# Altium PCB PCB2.PcbDoc (part 2 of 2)
Units mm, origin at the board's own origin, x right, y up, seen from the top; angles counter-clockwise.
Board outline 126 x 36 mm, 2 copper layers (Top Layer, Bottom Layer); 351 components, 48 nets, 702 pads, 346 vias.
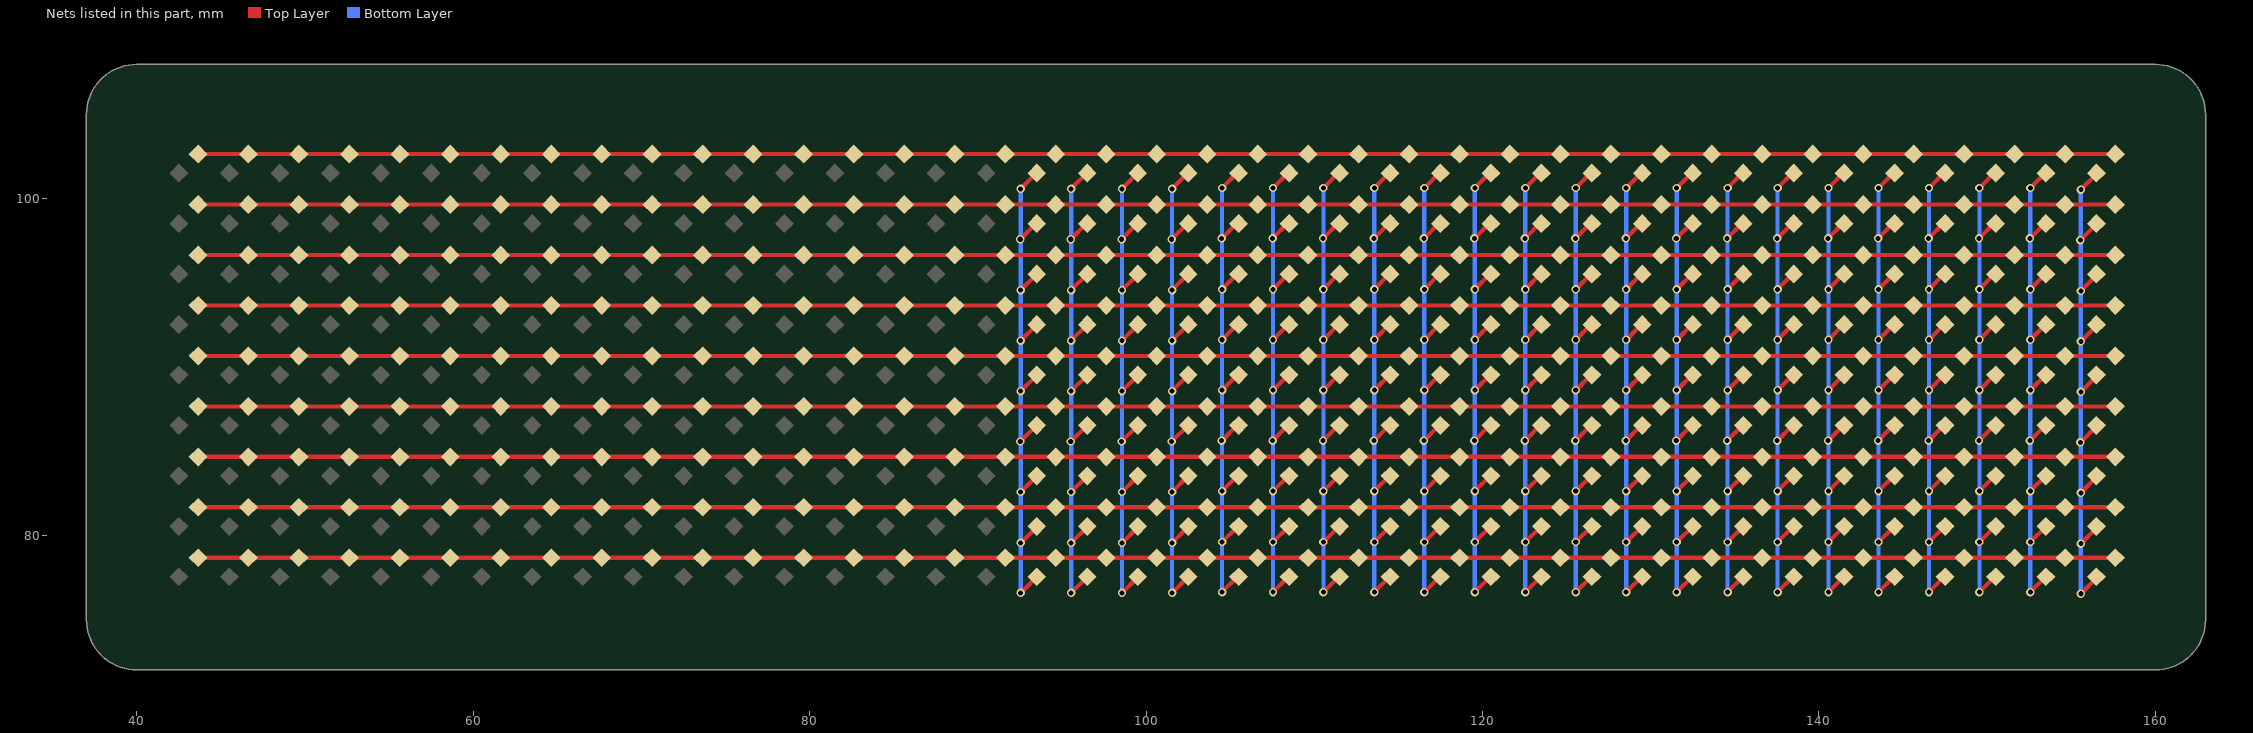
[diagram p2: the nets of this part, all layers, seen from the top]

## Via types
v1: diameter 0.5, hole 0.3, Top Layer to Bottom Layer, 342 vias
v2: diameter 3, hole 3, Top Layer to Bottom Layer, 4 vias

## Nets (pads, with @x,y where several pads share a name; then routed paths per layer and width w, separated by ;. In a path a pad name is that pad's centre, name@x,y a point inside that pad or via, vN(x,y) a via of type N, cw(c..) or ccw(c..) an arc to the next point about the centre after c; other vN are vias at no path point) (continued)
CS18: C1-18.2 C1-57.2 C1-96.2 C1-135.2 C1-174.2 C1-213.2 C1-252.2 C1-291.2 C1-330.2 | length 35.8
  Top Layer w0.254: v1(92.525,85.575) C1-213.2@93.457,86.507 ; v1(92.525,97.6) C1-57.2@93.457,98.532 ; v1(92.55,76.575) C1-330.2@93.482,77.507 ; v1(92.55,79.55) C1-291.2@93.482,80.482 ; v1(92.55,82.575) C1-252.2@93.482,83.507 ; v1(92.55,88.575) C1-174.2@93.482,89.507 ; v1(92.55,91.575) C1-135.2@93.482,92.507 ; v1(92.55,94.575) C1-96.2@93.482,95.507 ; v1(92.55,100.6) C1-18.2@93.482,101.532
  Bottom Layer w0.254: v1(92.55,76.575) v1(92.55,79.55) v1(92.55,82.575) v1(92.55,88.575) v1(92.55,91.575) v1(92.55,94.575) v1@92.55,100.55
CS19: C1-19.2 C1-58.2 C1-97.2 C1-136.2 C1-175.2 C1-214.2 C1-253.2 C1-292.2 C1-331.2 | length 35.8
  Top Layer w0.254: v1(95.525,85.575) C1-214.2@96.457,86.507 ; v1(95.525,97.6) C1-58.2@96.457,98.532 ; v1(95.55,76.575) C1-331.2@96.482,77.507 ; v1(95.55,79.55) C1-292.2@96.482,80.482 ; v1(95.55,82.575) C1-253.2@96.482,83.507 ; v1(95.55,88.575) C1-175.2@96.482,89.507 ; v1(95.55,91.575) C1-136.2@96.482,92.507 ; v1(95.55,94.575) C1-97.2@96.482,95.507 ; v1(95.55,100.6) C1-19.2@96.482,101.532
  Bottom Layer w0.254: v1(95.55,76.575) v1(95.55,79.55) v1(95.55,82.575) v1(95.55,88.575) v1(95.55,91.575) v1(95.55,94.575) v1@95.55,100.55
CS20: C1-20.2 C1-59.2 C1-98.2 C1-137.2 C1-176.2 C1-215.2 C1-254.2 C1-293.2 C1-332.2 | length 35.8
  Top Layer w0.254: v1(98.55,85.575) C1-215.2@99.482,86.507 ; v1(98.55,97.6) C1-59.2@99.482,98.532 ; v1(98.575,76.575) C1-332.2@99.507,77.507 ; v1(98.575,79.55) C1-293.2@99.507,80.482 ; v1(98.575,82.575) C1-254.2@99.507,83.507 ; v1(98.575,88.575) C1-176.2@99.507,89.507 ; v1(98.575,91.575) C1-137.2@99.507,92.507 ; v1(98.575,94.575) C1-98.2@99.507,95.507 ; v1(98.575,100.6) C1-20.2@99.507,101.532
  Bottom Layer w0.254: v1(98.575,76.575) v1(98.575,79.55) v1(98.575,82.575) v1(98.575,88.575) v1(98.575,91.575) v1(98.575,94.575) v1@98.575,100.55
CS21: C1-21.2 C1-60.2 C1-99.2 C1-138.2 C1-177.2 C1-216.2 C1-255.2 C1-294.2 C1-333.2 | length 35.8
  Top Layer w0.254: v1(101.525,85.575) C1-216.2@102.457,86.507 ; v1(101.525,97.6) C1-60.2@102.457,98.532 ; v1(101.55,76.575) C1-333.2@102.482,77.507 ; v1(101.55,79.55) C1-294.2@102.482,80.482 ; v1(101.55,82.575) C1-255.2@102.482,83.507 ; v1(101.55,88.575) C1-177.2@102.482,89.507 ; v1(101.55,91.575) C1-138.2@102.482,92.507 ; v1(101.55,94.575) C1-99.2@102.482,95.507 ; v1(101.55,100.6) C1-21.2@102.482,101.532
  Bottom Layer w0.254: v1(101.55,76.575) v1(101.55,79.55) v1(101.55,82.575) v1(101.55,88.575) v1(101.55,91.575) v1(101.55,94.575) v1@101.55,100.55
CS22: C1-22.2 C1-61.2 C1-100.2 C1-139.2 C1-178.2 C1-217.2 C1-256.2 C1-295.2 C1-334.2 | length 35.8
  Top Layer w0.254: v1(104.5,85.625) C1-217.2@105.432,86.557 ; v1(104.5,97.65) C1-61.2@105.432,98.582 ; v1(104.525,76.625) C1-334.2@105.457,77.557 ; v1(104.525,79.6) C1-295.2@105.457,80.532 ; v1(104.525,82.625) C1-256.2@105.457,83.557 ; v1(104.525,88.625) C1-178.2@105.457,89.557 ; v1(104.525,91.625) C1-139.2@105.457,92.557 ; v1(104.525,94.625) C1-100.2@105.457,95.557 ; v1(104.525,100.65) C1-22.2@105.457,101.582
  Bottom Layer w0.254: v1(104.525,76.625) v1(104.525,79.6) v1(104.525,82.625) v1(104.525,88.625) v1(104.525,91.625) v1(104.525,94.625) v1@104.525,100.6
CS23: C1-23.2 C1-62.2 C1-101.2 C1-140.2 C1-179.2 C1-218.2 C1-257.2 C1-296.2 C1-335.2 | length 35.8
  Top Layer w0.254: v1(107.525,85.625) C1-218.2@108.457,86.557 ; v1(107.525,97.65) C1-62.2@108.457,98.582 ; v1(107.55,76.625) C1-335.2@108.482,77.557 ; v1(107.55,79.6) C1-296.2@108.482,80.532 ; v1(107.55,82.625) C1-257.2@108.482,83.557 ; v1(107.55,88.625) C1-179.2@108.482,89.557 ; v1(107.55,91.625) C1-140.2@108.482,92.557 ; v1(107.55,94.625) C1-101.2@108.482,95.557 ; v1(107.55,100.65) C1-23.2@108.482,101.582
  Bottom Layer w0.254: v1(107.55,76.625) v1(107.55,79.6) v1(107.55,82.625) v1(107.55,88.625) v1(107.55,91.625) v1(107.55,94.625) v1@107.55,100.6
CS24: C1-24.2 C1-63.2 C1-102.2 C1-141.2 C1-180.2 C1-219.2 C1-258.2 C1-297.2 C1-336.2 | length 35.8
  Top Layer w0.254: v1(110.525,85.625) C1-219.2@111.457,86.557 ; v1(110.525,97.65) C1-63.2@111.457,98.582 ; v1(110.55,76.625) C1-336.2@111.482,77.557 ; v1(110.55,79.6) C1-297.2@111.482,80.532 ; v1(110.55,82.625) C1-258.2@111.482,83.557 ; v1(110.55,88.625) C1-180.2@111.482,89.557 ; v1(110.55,91.625) C1-141.2@111.482,92.557 ; v1(110.55,94.625) C1-102.2@111.482,95.557 ; v1(110.55,100.65) C1-24.2@111.482,101.582
  Bottom Layer w0.254: v1(110.55,76.625) v1(110.55,79.6) v1(110.55,82.625) v1(110.55,88.625) v1(110.55,91.625) v1(110.55,94.625) v1@110.55,100.6
CS25: C1-25.2 C1-64.2 C1-103.2 C1-142.2 C1-181.2 C1-220.2 C1-259.2 C1-298.2 C1-337.2 | length 35.8
  Top Layer w0.254: v1(113.55,85.625) C1-220.2@114.482,86.557 ; v1(113.55,97.65) C1-64.2@114.482,98.582 ; v1(113.575,76.625) C1-337.2@114.507,77.557 ; v1(113.575,79.6) C1-298.2@114.507,80.532 ; v1(113.575,82.625) C1-259.2@114.507,83.557 ; v1(113.575,88.625) C1-181.2@114.507,89.557 ; v1(113.575,91.625) C1-142.2@114.507,92.557 ; v1(113.575,94.625) C1-103.2@114.507,95.557 ; v1(113.575,100.65) C1-25.2@114.507,101.582
  Bottom Layer w0.254: v1(113.575,76.625) v1(113.575,79.6) v1(113.575,82.625) v1(113.575,88.625) v1(113.575,91.625) v1(113.575,94.625) v1@113.575,100.6
CS26: C1-26.2 C1-65.2 C1-104.2 C1-143.2 C1-182.2 C1-221.2 C1-260.2 C1-299.2 C1-338.2 | length 35.8
  Top Layer w0.254: v1(116.525,85.625) C1-221.2@117.457,86.557 ; v1(116.525,97.65) C1-65.2@117.457,98.582 ; v1(116.55,76.625) C1-338.2@117.482,77.557 ; v1(116.55,79.6) C1-299.2@117.482,80.532 ; v1(116.55,82.625) C1-260.2@117.482,83.557 ; v1(116.55,88.625) C1-182.2@117.482,89.557 ; v1(116.55,91.625) C1-143.2@117.482,92.557 ; v1(116.55,94.625) C1-104.2@117.482,95.557 ; v1(116.55,100.65) C1-26.2@117.482,101.582
  Bottom Layer w0.254: v1(116.55,76.625) v1(116.55,79.6) v1(116.55,82.625) v1(116.55,88.625) v1(116.55,91.625) v1(116.55,94.625) v1@116.55,100.6
CS27: C1-27.2 C1-66.2 C1-105.2 C1-144.2 C1-183.2 C1-222.2 C1-261.2 C1-300.2 C1-339.2 | length 35.8
  Top Layer w0.254: v1(119.525,85.625) C1-222.2@120.457,86.557 ; v1(119.525,97.65) C1-66.2@120.457,98.582 ; v1(119.55,76.625) C1-339.2@120.482,77.557 ; v1(119.55,79.6) C1-300.2@120.482,80.532 ; v1(119.55,82.625) C1-261.2@120.482,83.557 ; v1(119.55,88.625) C1-183.2@120.482,89.557 ; v1(119.55,91.625) C1-144.2@120.482,92.557 ; v1(119.55,94.625) C1-105.2@120.482,95.557 ; v1(119.55,100.65) C1-27.2@120.482,101.582
  Bottom Layer w0.254: v1(119.55,76.625) v1(119.55,79.6) v1(119.55,82.625) v1(119.55,88.625) v1(119.55,91.625) v1(119.55,94.625) v1@119.55,100.6
CS28: C1-28.2 C1-67.2 C1-106.2 C1-145.2 C1-184.2 C1-223.2 C1-262.2 C1-301.2 C1-340.2 | length 35.8
  Top Layer w0.254: v1(122.525,85.625) C1-223.2@123.457,86.557 ; v1(122.525,97.65) C1-67.2@123.457,98.582 ; v1(122.55,76.625) C1-340.2@123.482,77.557 ; v1(122.55,79.6) C1-301.2@123.482,80.532 ; v1(122.55,82.625) C1-262.2@123.482,83.557 ; v1(122.55,88.625) C1-184.2@123.482,89.557 ; v1(122.55,91.625) C1-145.2@123.482,92.557 ; v1(122.55,94.625) C1-106.2@123.482,95.557 ; v1(122.55,100.65) C1-28.2@123.482,101.582
  Bottom Layer w0.254: v1(122.55,76.625) v1(122.55,79.6) v1(122.55,82.625) v1(122.55,88.625) v1(122.55,91.625) v1(122.55,94.625) v1@122.55,100.6
CS29: C1-29.2 C1-68.2 C1-107.2 C1-146.2 C1-185.2 C1-224.2 C1-263.2 C1-302.2 C1-341.2 | length 35.8
  Top Layer w0.254: v1(125.525,85.625) C1-224.2@126.457,86.557 ; v1(125.525,97.65) C1-68.2@126.457,98.582 ; v1(125.55,76.625) C1-341.2@126.482,77.557 ; v1(125.55,79.6) C1-302.2@126.482,80.532 ; v1(125.55,82.625) C1-263.2@126.482,83.557 ; v1(125.55,88.625) C1-185.2@126.482,89.557 ; v1(125.55,91.625) C1-146.2@126.482,92.557 ; v1(125.55,94.625) C1-107.2@126.482,95.557 ; v1(125.55,100.65) C1-29.2@126.482,101.582
  Bottom Layer w0.254: v1(125.55,76.625) v1(125.55,79.6) v1(125.55,82.625) v1(125.55,88.625) v1(125.55,91.625) v1(125.55,94.625) v1@125.55,100.6
CS30: C1-30.2 C1-69.2 C1-108.2 C1-147.2 C1-186.2 C1-225.2 C1-264.2 C1-303.2 C1-342.2 | length 35.8
  Top Layer w0.254: v1(128.525,85.625) C1-225.2@129.457,86.557 ; v1(128.525,97.65) C1-69.2@129.457,98.582 ; v1(128.55,76.625) C1-342.2@129.482,77.557 ; v1(128.55,79.6) C1-303.2@129.482,80.532 ; v1(128.55,82.625) C1-264.2@129.482,83.557 ; v1(128.55,88.625) C1-186.2@129.482,89.557 ; v1(128.55,91.625) C1-147.2@129.482,92.557 ; v1(128.55,94.625) C1-108.2@129.482,95.557 ; v1(128.55,100.65) C1-30.2@129.482,101.582
  Bottom Layer w0.254: v1(128.55,76.625) v1(128.55,79.6) v1(128.55,82.625) v1(128.55,88.625) v1(128.55,91.625) v1(128.55,94.625) v1@128.55,100.6
CS31: C1-31.2 C1-70.2 C1-109.2 C1-148.2 C1-187.2 C1-226.2 C1-265.2 C1-304.2 C1-343.2 | length 35.8
  Top Layer w0.254: v1(131.525,85.625) C1-226.2@132.457,86.557 ; v1(131.525,97.65) C1-70.2@132.457,98.582 ; v1(131.55,76.625) C1-343.2@132.482,77.557 ; v1(131.55,79.6) C1-304.2@132.482,80.532 ; v1(131.55,82.625) C1-265.2@132.482,83.557 ; v1(131.55,88.625) C1-187.2@132.482,89.557 ; v1(131.55,91.625) C1-148.2@132.482,92.557 ; v1(131.55,94.625) C1-109.2@132.482,95.557 ; v1(131.55,100.65) C1-31.2@132.482,101.582
  Bottom Layer w0.254: v1(131.55,76.625) v1(131.55,79.6) v1(131.55,82.625) v1(131.55,88.625) v1(131.55,91.625) v1(131.55,94.625) v1@131.55,100.6
CS32: C1-32.2 C1-71.2 C1-110.2 C1-149.2 C1-188.2 C1-227.2 C1-266.2 C1-305.2 C1-344.2 | length 35.8
  Top Layer w0.254: v1(134.55,85.625) C1-227.2@135.482,86.557 ; v1(134.55,97.65) C1-71.2@135.482,98.582 ; v1(134.575,76.625) C1-344.2@135.507,77.557 ; v1(134.575,79.6) C1-305.2@135.507,80.532 ; v1(134.575,82.625) C1-266.2@135.507,83.557 ; v1(134.575,88.625) C1-188.2@135.507,89.557 ; v1(134.575,91.625) C1-149.2@135.507,92.557 ; v1(134.575,94.625) C1-110.2@135.507,95.557 ; v1(134.575,100.65) C1-32.2@135.507,101.582
  Bottom Layer w0.254: v1(134.575,76.625) v1(134.575,79.6) v1(134.575,82.625) v1(134.575,88.625) v1(134.575,91.625) v1(134.575,94.625) v1@134.575,100.6
CS33: C1-33.2 C1-72.2 C1-111.2 C1-150.2 C1-189.2 C1-228.2 C1-267.2 C1-306.2 C1-345.2 | length 35.8
  Top Layer w0.254: v1(137.525,85.625) C1-228.2@138.457,86.557 ; v1(137.525,97.65) C1-72.2@138.457,98.582 ; v1(137.55,76.625) C1-345.2@138.482,77.557 ; v1(137.55,79.6) C1-306.2@138.482,80.532 ; v1(137.55,82.625) C1-267.2@138.482,83.557 ; v1(137.55,88.625) C1-189.2@138.482,89.557 ; v1(137.55,91.625) C1-150.2@138.482,92.557 ; v1(137.55,94.625) C1-111.2@138.482,95.557 ; v1(137.55,100.65) C1-33.2@138.482,101.582
  Bottom Layer w0.254: v1(137.55,76.625) v1(137.55,79.6) v1(137.55,82.625) v1(137.55,88.625) v1(137.55,91.625) v1(137.55,94.625) v1@137.55,100.6
CS34: C1-34.2 C1-73.2 C1-112.2 C1-151.2 C1-190.2 C1-229.2 C1-268.2 C1-307.2 C1-346.2 | length 35.8
  Top Layer w0.254: v1(140.55,85.625) C1-229.2@141.482,86.557 ; v1(140.55,97.65) C1-73.2@141.482,98.582 ; v1(140.575,76.625) C1-346.2@141.507,77.557 ; v1(140.575,79.6) C1-307.2@141.507,80.532 ; v1(140.575,82.625) C1-268.2@141.507,83.557 ; v1(140.575,88.625) C1-190.2@141.507,89.557 ; v1(140.575,91.625) C1-151.2@141.507,92.557 ; v1(140.575,94.625) C1-112.2@141.507,95.557 ; v1(140.575,100.65) C1-34.2@141.507,101.582
  Bottom Layer w0.254: v1(140.575,76.625) v1(140.575,79.6) v1(140.575,82.625) v1(140.575,88.625) v1(140.575,91.625) v1(140.575,94.625) v1@140.575,100.6
CS35: C1-35.2 C1-74.2 C1-113.2 C1-152.2 C1-191.2 C1-230.2 C1-269.2 C1-308.2 C1-347.2 | length 35.8
  Top Layer w0.254: v1(143.525,85.625) C1-230.2@144.457,86.557 ; v1(143.525,97.65) C1-74.2@144.457,98.582 ; v1(143.55,76.625) C1-347.2@144.482,77.557 ; v1(143.55,79.6) C1-308.2@144.482,80.532 ; v1(143.55,82.625) C1-269.2@144.482,83.557 ; v1(143.55,88.625) C1-191.2@144.482,89.557 ; v1(143.55,91.625) C1-152.2@144.482,92.557 ; v1(143.55,94.625) C1-113.2@144.482,95.557 ; v1(143.55,100.65) C1-35.2@144.482,101.582
  Bottom Layer w0.254: v1(143.55,76.625) v1(143.55,79.6) v1(143.55,82.625) v1(143.55,88.625) v1(143.55,91.625) v1(143.55,94.625) v1@143.55,100.6
CS36: C1-36.2 C1-75.2 C1-114.2 C1-153.2 C1-192.2 C1-231.2 C1-270.2 C1-309.2 C1-348.2 | length 35.8
  Top Layer w0.254: v1(146.525,85.625) C1-231.2@147.457,86.557 ; v1(146.525,97.65) C1-75.2@147.457,98.582 ; v1(146.55,76.625) C1-348.2@147.482,77.557 ; v1(146.55,79.6) C1-309.2@147.482,80.532 ; v1(146.55,82.625) C1-270.2@147.482,83.557 ; v1(146.55,88.625) C1-192.2@147.482,89.557 ; v1(146.55,91.625) C1-153.2@147.482,92.557 ; v1(146.55,94.625) C1-114.2@147.482,95.557 ; v1(146.55,100.65) C1-36.2@147.482,101.582
  Bottom Layer w0.254: v1(146.55,76.625) v1(146.55,79.6) v1(146.55,82.625) v1(146.55,88.625) v1(146.55,91.625) v1(146.55,94.625) v1@146.55,100.6
CS37: C1-37.2 C1-76.2 C1-115.2 C1-154.2 C1-193.2 C1-232.2 C1-271.2 C1-310.2 C1-349.2 | length 35.8
  Top Layer w0.254: v1(149.525,85.625) C1-232.2@150.457,86.557 ; v1(149.525,97.65) C1-76.2@150.457,98.582 ; v1(149.55,76.625) C1-349.2@150.482,77.557 ; v1(149.55,79.6) C1-310.2@150.482,80.532 ; v1(149.55,82.625) C1-271.2@150.482,83.557 ; v1(149.55,88.625) C1-193.2@150.482,89.557 ; v1(149.55,91.625) C1-154.2@150.482,92.557 ; v1(149.55,94.625) C1-115.2@150.482,95.557 ; v1(149.55,100.65) C1-37.2@150.482,101.582
  Bottom Layer w0.254: v1(149.55,76.625) v1(149.55,79.6) v1(149.55,82.625) v1(149.55,88.625) v1(149.55,91.625) v1(149.55,94.625) v1@149.55,100.6
CS38: C1-38.2 C1-77.2 C1-116.2 C1-155.2 C1-194.2 C1-233.2 C1-272.2 C1-311.2 C1-350.2 | length 35.8
  Top Layer w0.254: v1(152.55,85.625) C1-233.2@153.482,86.557 ; v1(152.55,97.65) C1-77.2@153.482,98.582 ; v1(152.575,76.625) C1-350.2@153.507,77.557 ; v1(152.575,79.6) C1-311.2@153.507,80.532 ; v1(152.575,82.625) C1-272.2@153.507,83.557 ; v1(152.575,88.625) C1-194.2@153.507,89.557 ; v1(152.575,91.625) C1-155.2@153.507,92.557 ; v1(152.575,94.625) C1-116.2@153.507,95.557 ; v1(152.575,100.65) C1-38.2@153.507,101.582
  Bottom Layer w0.254: v1(152.575,76.625) v1(152.575,79.6) v1(152.575,82.625) v1(152.575,88.625) v1(152.575,91.625) v1(152.575,94.625) v1@152.575,100.6
CS39: C1-39.2 C1-78.2 C1-117.2 C1-156.2 C1-195.2 C1-234.2 C1-273.2 C1-312.2 C1-351.2 | length 35.8
  Top Layer w0.254: v1(155.55,85.525) C1-234.2@156.482,86.457 ; v1(155.55,97.55) C1-78.2@156.482,98.482 ; v1(155.575,76.525) C1-351.2@156.507,77.457 ; v1(155.575,79.5) C1-312.2@156.507,80.432 ; v1(155.575,82.525) C1-273.2@156.507,83.457 ; v1(155.575,88.525) C1-195.2@156.507,89.457 ; v1(155.575,91.525) C1-156.2@156.507,92.457 ; v1(155.575,94.525) C1-117.2@156.507,95.457 ; v1(155.575,100.55) C1-39.2@156.507,101.482
  Bottom Layer w0.254: v1(155.575,76.525) v1(155.575,79.5) v1(155.575,82.525) v1(155.575,88.525) v1(155.575,91.525) v1(155.575,94.525) v1@155.575,100.5
SW1: C1-1.1 C1-2.1 C1-3.1 C1-4.1 C1-5.1 C1-6.1 C1-7.1 C1-8.1 C1-9.1 C1-10.1 C1-11.1 C1-12.1 C1-13.1 C1-14.1 C1-15.1 C1-16.1 C1-17.1 C1-18.1 C1-19.1 C1-20.1 C1-21.1 C1-22.1 C1-23.1 C1-24.1 C1-25.1 C1-26.1 C1-27.1 C1-28.1 C1-29.1 C1-30.1 C1-31.1 C1-32.1 C1-33.1 C1-34.1 C1-35.1 C1-36.1 C1-37.1 C1-38.1 C1-39.1 | length 114
  Top Layer w0.254: C1-1.1@43.639,102.664 C1-2.1@46.639,102.664 C1-3.1@49.639,102.664 C1-4.1@52.639,102.664 C1-5.1@55.639,102.664 C1-6.1@58.639,102.664 C1-7.1@61.639,102.664 C1-8.1@64.639,102.664 C1-9.1@67.639,102.664 C1-10.1@70.639,102.664 C1-11.1@73.639,102.664 C1-12.1@76.639,102.664 C1-13.1@79.639,102.664 C1-14.1@82.639,102.664 C1-15.1@85.639,102.664 C1-16.1@88.639,102.664 C1-17.1@91.639,102.664 C1-18.1@94.639,102.664 C1-19.1@97.639,102.664 C1-20.1@100.639,102.664 C1-21.1@103.639,102.664 C1-22.1@106.639,102.664 C1-23.1@109.639,102.664 C1-24.1@112.639,102.664 C1-25.1@115.639,102.664 C1-26.1@118.639,102.664 C1-27.1@121.639,102.664 C1-28.1@124.639,102.664 C1-29.1@127.639,102.664 C1-30.1@130.639,102.664 C1-31.1@133.639,102.664 C1-32.1@136.639,102.664 C1-33.1@139.639,102.664 C1-34.1@142.639,102.664 C1-35.1@145.639,102.664 C1-36.1@148.639,102.664 C1-37.1@151.639,102.664 C1-38.1@154.639,102.664 C1-39.1@157.639,102.664
SW2: C1-40.1 C1-41.1 C1-42.1 C1-43.1 C1-44.1 C1-45.1 C1-46.1 C1-47.1 C1-48.1 C1-49.1 C1-50.1 C1-51.1 C1-52.1 C1-53.1 C1-54.1 C1-55.1 C1-56.1 C1-57.1 C1-58.1 C1-59.1 C1-60.1 C1-61.1 C1-62.1 C1-63.1 C1-64.1 C1-65.1 C1-66.1 C1-67.1 C1-68.1 C1-69.1 C1-70.1 C1-71.1 C1-72.1 C1-73.1 C1-74.1 C1-75.1 C1-76.1 C1-77.1 C1-78.1 | length 114
  Top Layer w0.254: C1-40.1@43.639,99.664 C1-41.1@46.639,99.664 C1-42.1@49.639,99.664 C1-43.1@52.639,99.664 C1-44.1@55.639,99.664 C1-45.1@58.639,99.664 C1-46.1@61.639,99.664 C1-47.1@64.639,99.664 C1-48.1@67.639,99.664 C1-49.1@70.639,99.664 C1-50.1@73.639,99.664 C1-51.1@76.639,99.664 C1-52.1@79.639,99.664 C1-53.1@82.639,99.664 C1-54.1@85.639,99.664 C1-55.1@88.639,99.664 C1-56.1@91.639,99.664 C1-57.1@94.639,99.664 C1-58.1@97.639,99.664 C1-59.1@100.639,99.664 C1-60.1@103.639,99.664 C1-61.1@106.639,99.664 C1-62.1@109.639,99.664 C1-63.1@112.639,99.664 C1-64.1@115.639,99.664 C1-65.1@118.639,99.664 C1-66.1@121.639,99.664 C1-67.1@124.639,99.664 C1-68.1@127.639,99.664 C1-69.1@130.639,99.664 C1-70.1@133.639,99.664 C1-71.1@136.639,99.664 C1-72.1@139.639,99.664 C1-73.1@142.639,99.664 C1-74.1@145.639,99.664 C1-75.1@148.639,99.664 C1-76.1@151.639,99.664 C1-77.1@154.639,99.664 C1-78.1@157.639,99.664
SW3: C1-79.1 C1-80.1 C1-81.1 C1-82.1 C1-83.1 C1-84.1 C1-85.1 C1-86.1 C1-87.1 C1-88.1 C1-89.1 C1-90.1 C1-91.1 C1-92.1 C1-93.1 C1-94.1 C1-95.1 C1-96.1 C1-97.1 C1-98.1 C1-99.1 C1-100.1 C1-101.1 C1-102.1 C1-103.1 C1-104.1 C1-105.1 C1-106.1 C1-107.1 C1-108.1 C1-109.1 C1-110.1 C1-111.1 C1-112.1 C1-113.1 C1-114.1 C1-115.1 C1-116.1 C1-117.1 | length 114
  Top Layer w0.254: C1-79.1@43.639,96.664 C1-80.1@46.639,96.664 C1-81.1@49.639,96.664 C1-82.1@52.639,96.664 C1-83.1@55.639,96.664 C1-84.1@58.639,96.664 C1-85.1@61.639,96.664 C1-86.1@64.639,96.664 C1-87.1@67.639,96.664 C1-88.1@70.639,96.664 C1-89.1@73.639,96.664 C1-90.1@76.639,96.664 C1-91.1@79.639,96.664 C1-92.1@82.639,96.664 C1-93.1@85.639,96.664 C1-94.1@88.639,96.664 C1-95.1@91.639,96.664 C1-96.1@94.639,96.664 C1-97.1@97.639,96.664 C1-98.1@100.639,96.664 C1-99.1@103.639,96.664 C1-100.1@106.639,96.664 C1-101.1@109.639,96.664 C1-102.1@112.639,96.664 C1-103.1@115.639,96.664 C1-104.1@118.639,96.664 C1-105.1@121.639,96.664 C1-106.1@124.639,96.664 C1-107.1@127.639,96.664 C1-108.1@130.639,96.664 C1-109.1@133.639,96.664 C1-110.1@136.639,96.664 C1-111.1@139.639,96.664 C1-112.1@142.639,96.664 C1-113.1@145.639,96.664 C1-114.1@148.639,96.664 C1-115.1@151.639,96.664 C1-116.1@154.639,96.664 C1-117.1@157.639,96.664
SW4: C1-118.1 C1-119.1 C1-120.1 C1-121.1 C1-122.1 C1-123.1 C1-124.1 C1-125.1 C1-126.1 C1-127.1 C1-128.1 C1-129.1 C1-130.1 C1-131.1 C1-132.1 C1-133.1 C1-134.1 C1-135.1 C1-136.1 C1-137.1 C1-138.1 C1-139.1 C1-140.1 C1-141.1 C1-142.1 C1-143.1 C1-144.1 C1-145.1 C1-146.1 C1-147.1 C1-148.1 C1-149.1 C1-150.1 C1-151.1 C1-152.1 C1-153.1 C1-154.1 C1-155.1 C1-156.1 | length 114
  Top Layer w0.254: C1-118.1@43.639,93.664 C1-119.1@46.639,93.664 C1-120.1@49.639,93.664 C1-121.1@52.639,93.664 C1-122.1@55.639,93.664 C1-123.1@58.639,93.664 C1-124.1@61.639,93.664 C1-125.1@64.639,93.664 C1-126.1@67.639,93.664 C1-127.1@70.639,93.664 C1-128.1@73.639,93.664 C1-129.1@76.639,93.664 C1-130.1@79.639,93.664 C1-131.1@82.639,93.664 C1-132.1@85.639,93.664 C1-133.1@88.639,93.664 C1-134.1@91.639,93.664 C1-135.1@94.639,93.664 C1-136.1@97.639,93.664 C1-137.1@100.639,93.664 C1-138.1@103.639,93.664 C1-139.1@106.639,93.664 C1-140.1@109.639,93.664 C1-141.1@112.639,93.664 C1-142.1@115.639,93.664 C1-143.1@118.639,93.664 C1-144.1@121.639,93.664 C1-145.1@124.639,93.664 C1-146.1@127.639,93.664 C1-147.1@130.639,93.664 C1-148.1@133.639,93.664 C1-149.1@136.639,93.664 C1-150.1@139.639,93.664 C1-151.1@142.639,93.664 C1-152.1@145.639,93.664 C1-153.1@148.639,93.664 C1-154.1@151.639,93.664 C1-155.1@154.639,93.664 C1-156.1@157.639,93.664
SW5: C1-157.1 C1-158.1 C1-159.1 C1-160.1 C1-161.1 C1-162.1 C1-163.1 C1-164.1 C1-165.1 C1-166.1 C1-167.1 C1-168.1 C1-169.1 C1-170.1 C1-171.1 C1-172.1 C1-173.1 C1-174.1 C1-175.1 C1-176.1 C1-177.1 C1-178.1 C1-179.1 C1-180.1 C1-181.1 C1-182.1 C1-183.1 C1-184.1 C1-185.1 C1-186.1 C1-187.1 C1-188.1 C1-189.1 C1-190.1 C1-191.1 C1-192.1 C1-193.1 C1-194.1 C1-195.1 | length 114
  Top Layer w0.254: C1-157.1@43.639,90.664 C1-158.1@46.639,90.664 C1-159.1@49.639,90.664 C1-160.1@52.639,90.664 C1-161.1@55.639,90.664 C1-162.1@58.639,90.664 C1-163.1@61.639,90.664 C1-164.1@64.639,90.664 C1-165.1@67.639,90.664 C1-166.1@70.639,90.664 C1-167.1@73.639,90.664 C1-168.1@76.639,90.664 C1-169.1@79.639,90.664 C1-170.1@82.639,90.664 C1-171.1@85.639,90.664 C1-172.1@88.639,90.664 C1-173.1@91.639,90.664 C1-174.1@94.639,90.664 C1-175.1@97.639,90.664 C1-176.1@100.639,90.664 C1-177.1@103.639,90.664 C1-178.1@106.639,90.664 C1-179.1@109.639,90.664 C1-180.1@112.639,90.664 C1-181.1@115.639,90.664 C1-182.1@118.639,90.664 C1-183.1@121.639,90.664 C1-184.1@124.639,90.664 C1-185.1@127.639,90.664 C1-186.1@130.639,90.664 C1-187.1@133.639,90.664 C1-188.1@136.639,90.664 C1-189.1@139.639,90.664 C1-190.1@142.639,90.664 C1-191.1@145.639,90.664 C1-192.1@148.639,90.664 C1-193.1@151.639,90.664 C1-194.1@154.639,90.664 C1-195.1@157.639,90.664
SW6: C1-196.1 C1-197.1 C1-198.1 C1-199.1 C1-200.1 C1-201.1 C1-202.1 C1-203.1 C1-204.1 C1-205.1 C1-206.1 C1-207.1 C1-208.1 C1-209.1 C1-210.1 C1-211.1 C1-212.1 C1-213.1 C1-214.1 C1-215.1 C1-216.1 C1-217.1 C1-218.1 C1-219.1 C1-220.1 C1-221.1 C1-222.1 C1-223.1 C1-224.1 C1-225.1 C1-226.1 C1-227.1 C1-228.1 C1-229.1 C1-230.1 C1-231.1 C1-232.1 C1-233.1 C1-234.1 | length 114
  Top Layer w0.254: C1-196.1@43.639,87.664 C1-197.1@46.639,87.664 C1-198.1@49.639,87.664 C1-199.1@52.639,87.664 C1-200.1@55.639,87.664 C1-201.1@58.639,87.664 C1-202.1@61.639,87.664 C1-203.1@64.639,87.664 C1-204.1@67.639,87.664 C1-205.1@70.639,87.664 C1-206.1@73.639,87.664 C1-207.1@76.639,87.664 C1-208.1@79.639,87.664 C1-209.1@82.639,87.664 C1-210.1@85.639,87.664 C1-211.1@88.639,87.664 C1-212.1@91.639,87.664 C1-213.1@94.639,87.664 C1-214.1@97.639,87.664 C1-215.1@100.639,87.664 C1-216.1@103.639,87.664 C1-217.1@106.639,87.664 C1-218.1@109.639,87.664 C1-219.1@112.639,87.664 C1-220.1@115.639,87.664 C1-221.1@118.639,87.664 C1-222.1@121.639,87.664 C1-223.1@124.639,87.664 C1-224.1@127.639,87.664 C1-225.1@130.639,87.664 C1-226.1@133.639,87.664 C1-227.1@136.639,87.664 C1-228.1@139.639,87.664 C1-229.1@142.639,87.664 C1-230.1@145.639,87.664 C1-231.1@148.639,87.664 C1-232.1@151.639,87.664 C1-233.1@154.639,87.664 C1-234.1@157.639,87.664
SW7: C1-235.1 C1-236.1 C1-237.1 C1-238.1 C1-239.1 C1-240.1 C1-241.1 C1-242.1 C1-243.1 C1-244.1 C1-245.1 C1-246.1 C1-247.1 C1-248.1 C1-249.1 C1-250.1 C1-251.1 C1-252.1 C1-253.1 C1-254.1 C1-255.1 C1-256.1 C1-257.1 C1-258.1 C1-259.1 C1-260.1 C1-261.1 C1-262.1 C1-263.1 C1-264.1 C1-265.1 C1-266.1 C1-267.1 C1-268.1 C1-269.1 C1-270.1 C1-271.1 C1-272.1 C1-273.1 | length 114
  Top Layer w0.254: C1-235.1@43.639,84.664 C1-236.1@46.639,84.664 C1-237.1@49.639,84.664 C1-238.1@52.639,84.664 C1-239.1@55.639,84.664 C1-240.1@58.639,84.664 C1-241.1@61.639,84.664 C1-242.1@64.639,84.664 C1-243.1@67.639,84.664 C1-244.1@70.639,84.664 C1-245.1@73.639,84.664 C1-246.1@76.639,84.664 C1-247.1@79.639,84.664 C1-248.1@82.639,84.664 C1-249.1@85.639,84.664 C1-250.1@88.639,84.664 C1-251.1@91.639,84.664 C1-252.1@94.639,84.664 C1-253.1@97.639,84.664 C1-254.1@100.639,84.664 C1-255.1@103.639,84.664 C1-256.1@106.639,84.664 C1-257.1@109.639,84.664 C1-258.1@112.639,84.664 C1-259.1@115.639,84.664 C1-260.1@118.639,84.664 C1-261.1@121.639,84.664 C1-262.1@124.639,84.664 C1-263.1@127.639,84.664 C1-264.1@130.639,84.664 C1-265.1@133.639,84.664 C1-266.1@136.639,84.664 C1-267.1@139.639,84.664 C1-268.1@142.639,84.664 C1-269.1@145.639,84.664 C1-270.1@148.639,84.664 C1-271.1@151.639,84.664 C1-272.1@154.639,84.664 C1-273.1@157.639,84.664
SW8: C1-274.1 C1-275.1 C1-276.1 C1-277.1 C1-278.1 C1-279.1 C1-280.1 C1-281.1 C1-282.1 C1-283.1 C1-284.1 C1-285.1 C1-286.1 C1-287.1 C1-288.1 C1-289.1 C1-290.1 C1-291.1 C1-292.1 C1-293.1 C1-294.1 C1-295.1 C1-296.1 C1-297.1 C1-298.1 C1-299.1 C1-300.1 C1-301.1 C1-302.1 C1-303.1 C1-304.1 C1-305.1 C1-306.1 C1-307.1 C1-308.1 C1-309.1 C1-310.1 C1-311.1 C1-312.1 | length 114
  Top Layer w0.254: C1-274.1@43.639,81.664 C1-275.1@46.639,81.664 C1-276.1@49.639,81.664 C1-277.1@52.639,81.664 C1-278.1@55.639,81.664 C1-279.1@58.639,81.664 C1-280.1@61.639,81.664 C1-281.1@64.639,81.664 C1-282.1@67.639,81.664 C1-283.1@70.639,81.664 C1-284.1@73.639,81.664 C1-285.1@76.639,81.664 C1-286.1@79.639,81.664 C1-287.1@82.639,81.664 C1-288.1@85.639,81.664 C1-289.1@88.639,81.664 C1-290.1@91.639,81.664 C1-291.1@94.639,81.664 C1-292.1@97.639,81.664 C1-293.1@100.639,81.664 C1-294.1@103.639,81.664 C1-295.1@106.639,81.664 C1-296.1@109.639,81.664 C1-297.1@112.639,81.664 C1-298.1@115.639,81.664 C1-299.1@118.639,81.664 C1-300.1@121.639,81.664 C1-301.1@124.639,81.664 C1-302.1@127.639,81.664 C1-303.1@130.639,81.664 C1-304.1@133.639,81.664 C1-305.1@136.639,81.664 C1-306.1@139.639,81.664 C1-307.1@142.639,81.664 C1-308.1@145.639,81.664 C1-309.1@148.639,81.664 C1-310.1@151.639,81.664 C1-311.1@154.639,81.664 C1-312.1@157.639,81.664
SW9: C1-313.1 C1-314.1 C1-315.1 C1-316.1 C1-317.1 C1-318.1 C1-319.1 C1-320.1 C1-321.1 C1-322.1 C1-323.1 C1-324.1 C1-325.1 C1-326.1 C1-327.1 C1-328.1 C1-329.1 C1-330.1 C1-331.1 C1-332.1 C1-333.1 C1-334.1 C1-335.1 C1-336.1 C1-337.1 C1-338.1 C1-339.1 C1-340.1 C1-341.1 C1-342.1 C1-343.1 C1-344.1 C1-345.1 C1-346.1 C1-347.1 C1-348.1 C1-349.1 C1-350.1 C1-351.1 | length 114
  Top Layer w0.254: C1-313.1@43.639,78.664 C1-314.1@46.639,78.664 C1-315.1@49.639,78.664 C1-316.1@52.639,78.664 C1-317.1@55.639,78.664 C1-318.1@58.639,78.664 C1-319.1@61.639,78.664 C1-320.1@64.639,78.664 C1-321.1@67.639,78.664 C1-322.1@70.639,78.664 C1-323.1@73.639,78.664 C1-324.1@76.639,78.664 C1-325.1@79.639,78.664 C1-326.1@82.639,78.664 C1-327.1@85.639,78.664 C1-328.1@88.639,78.664 C1-329.1@91.639,78.664 C1-330.1@94.639,78.664 C1-331.1@97.639,78.664 C1-332.1@100.639,78.664 C1-333.1@103.639,78.664 C1-334.1@106.639,78.664 C1-335.1@109.639,78.664 C1-336.1@112.639,78.664 C1-337.1@115.639,78.664 C1-338.1@118.639,78.664 C1-339.1@121.639,78.664 C1-340.1@124.639,78.664 C1-341.1@127.639,78.664 C1-342.1@130.639,78.664 C1-343.1@133.639,78.664 C1-344.1@136.639,78.664 C1-345.1@139.639,78.664 C1-346.1@142.639,78.664 C1-347.1@145.639,78.664 C1-348.1@148.639,78.664 C1-349.1@151.639,78.664 C1-350.1@154.639,78.664 C1-351.1@157.639,78.664
copper on no net:
  other v2: 40,75 160,75 40,105 160,105

## Silkscreen, mask and mechanical layers (free items; w line width, h text height)
Mechanical 1:
  lines w0.254: 37,75 ccw(c40,75) 40,72 ; 37,75 37,105 ; 37,75 40,75 ; 37,105 cw(c40,105) 40,108 ; 37,105 40,105 ; 40,72 160,72 ; 40,72 40,75 ; 40,75 40,105 ; 40,75 160,75 ; 40,105 160,105 ; 40,105 40,108 ; 40,108 160,108 ; 160,72 ccw(c160,75) 163,75 ; 160,72 160,75 ; 160,75 163,75 ; 160,75 160,105 ; 160,105 163,105 ; 160,105 160,108 ; 160,108 cw(c160,105) 163,105 ; 163,75 163,105